# Altium PCB IMU.PcbDoc
Units mm, origin at the board's own origin, x right, y up, seen from the top; angles counter-clockwise.
Board outline 21.75 x 40.75 mm, 2 copper layers (Top Layer, Bottom Layer); 23 components, 27 nets, 121 pads, 63 vias.
Unrouted connection lines stored in the file: 63.
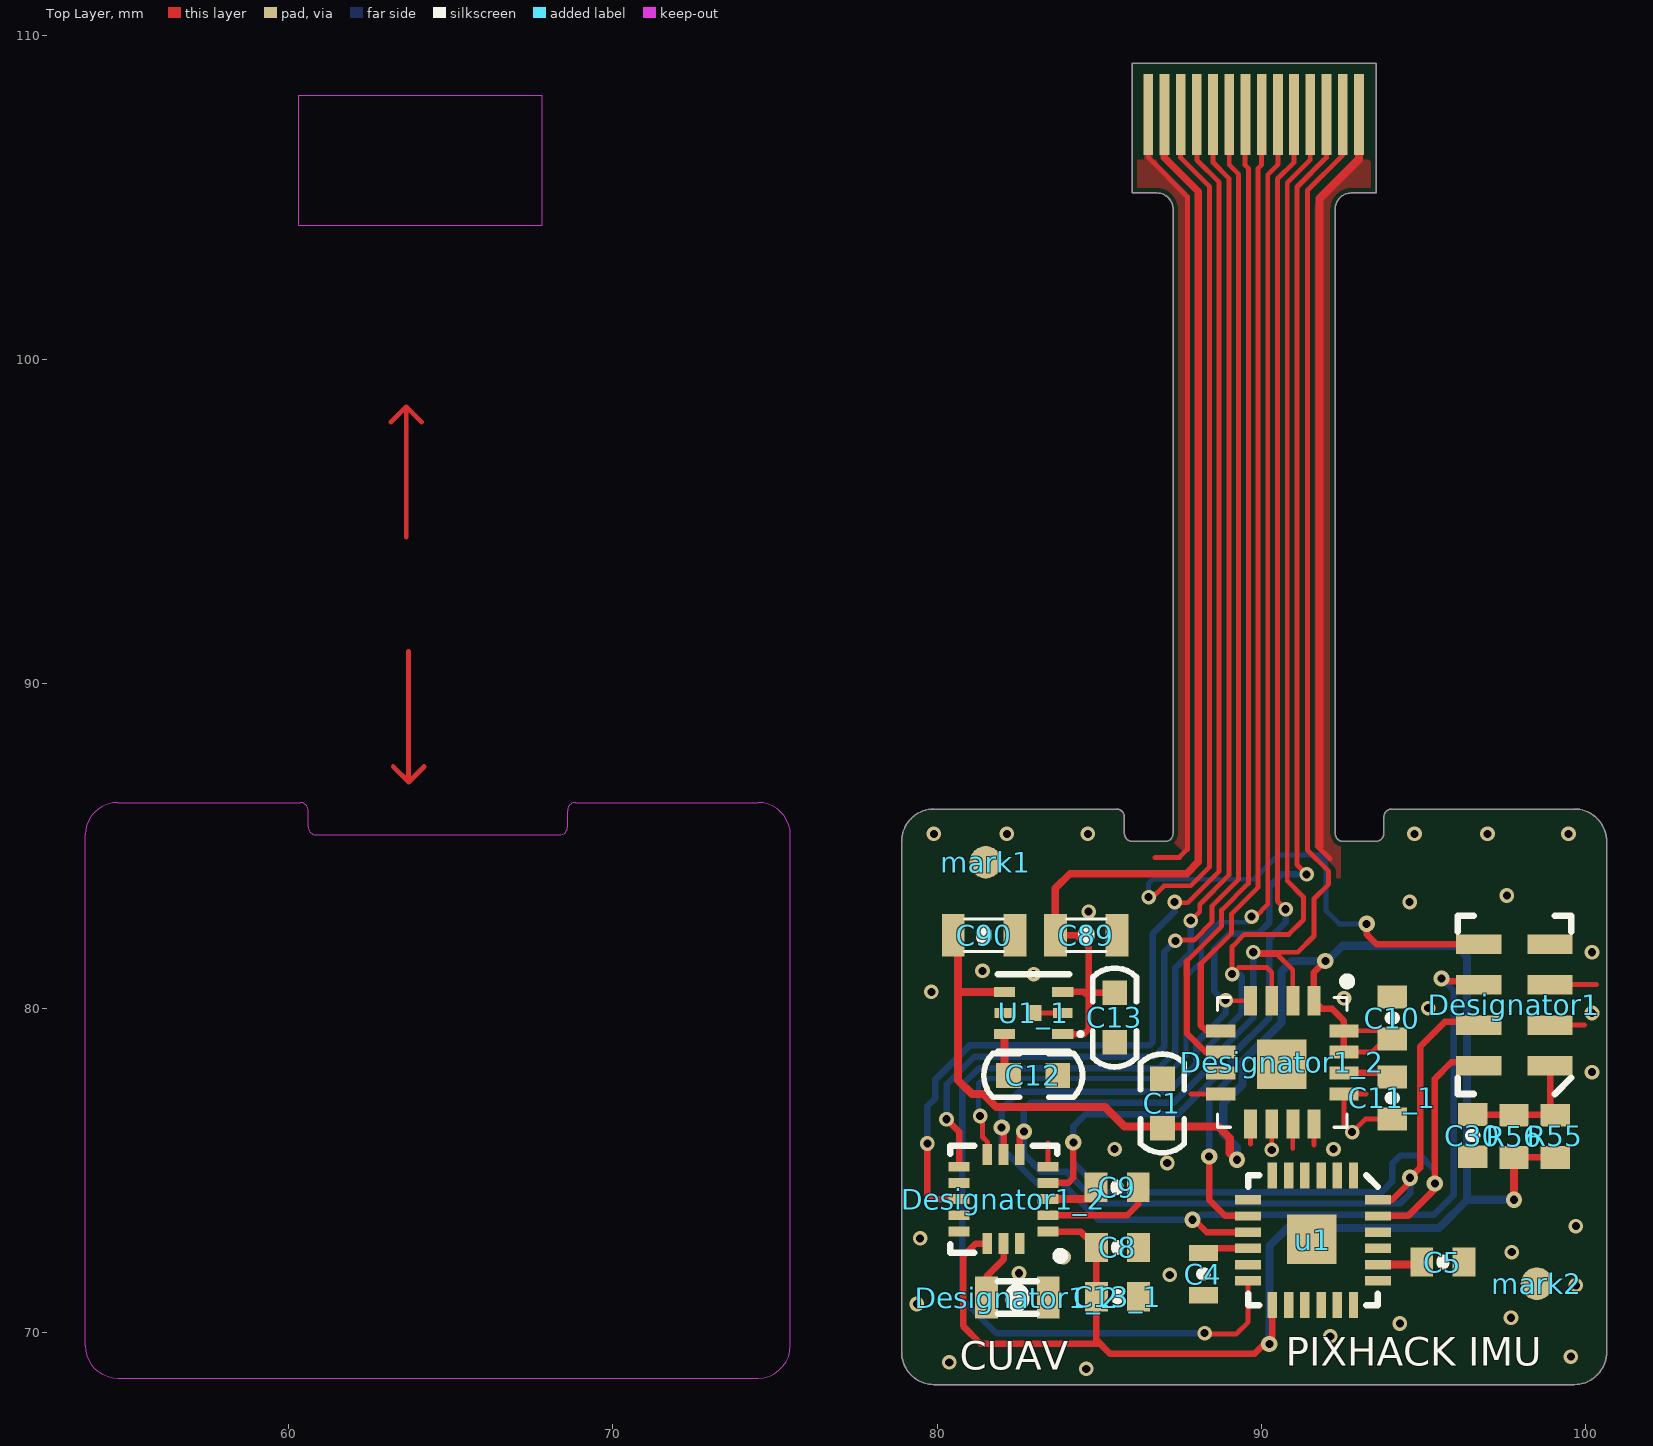
[diagram p0: Top Layer view]
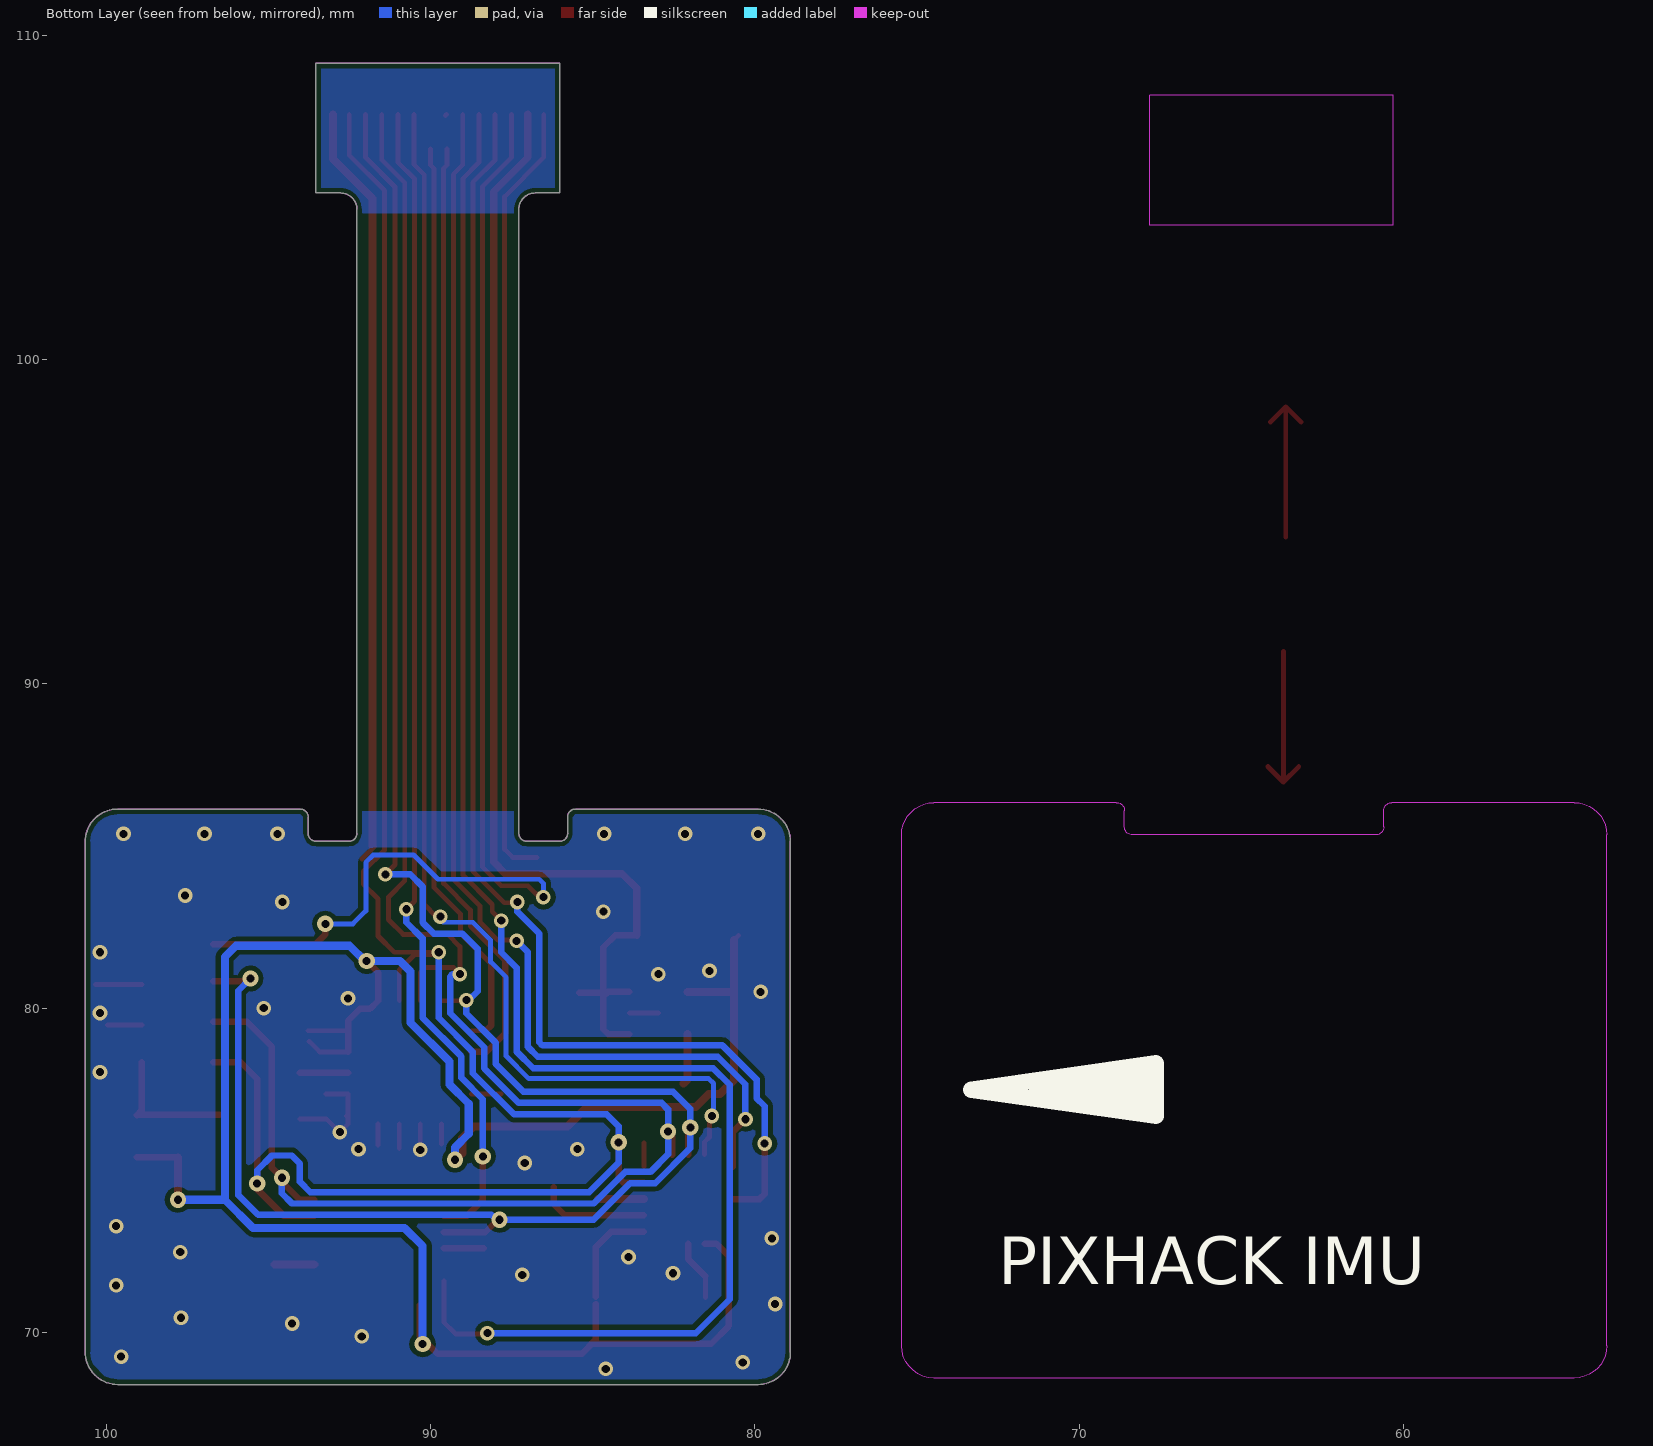
[diagram p1: Bottom Layer view, seen from below]
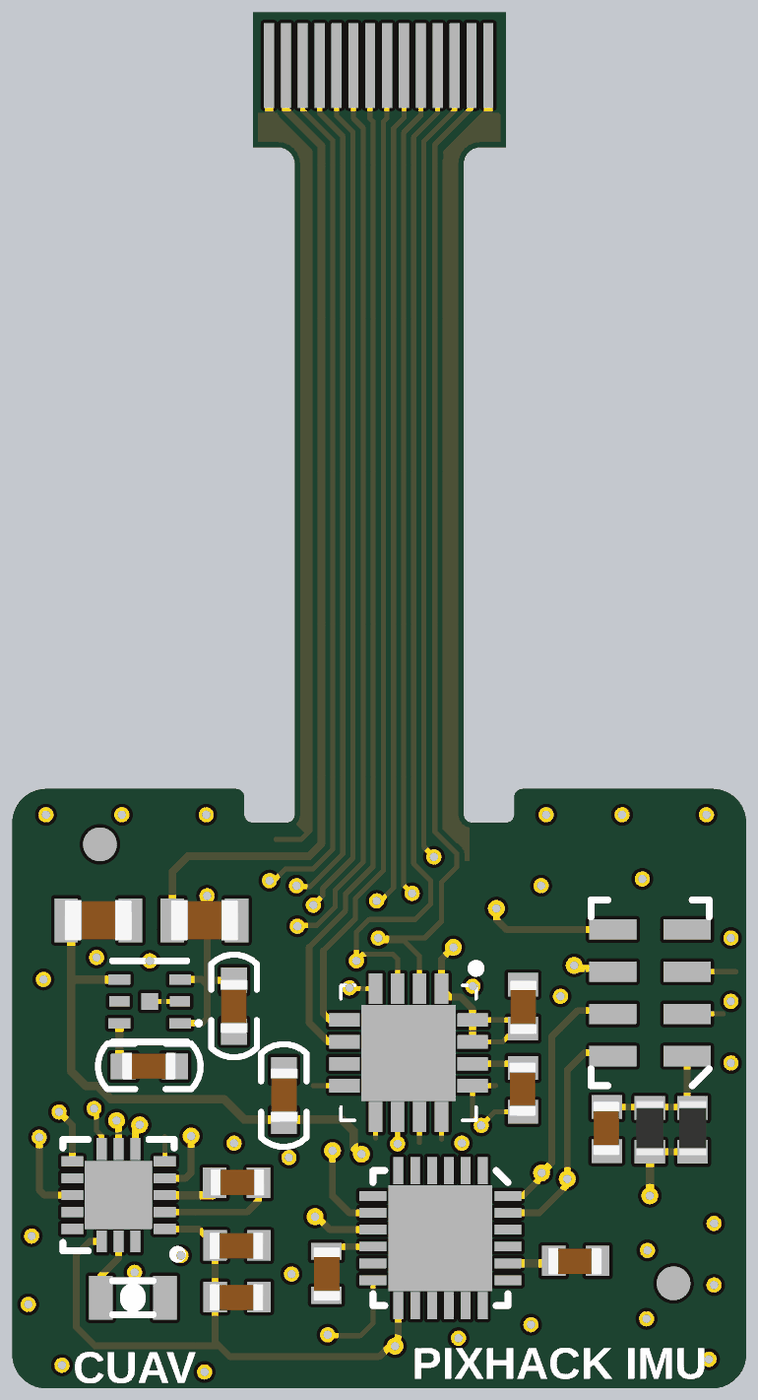
[diagram p2: 3D render of the assembled board from above, using the file's embedded part models]

## Layer stack, top to bottom
Top Layer: signal copper 0.0356
Dielectric: dielectric 0.32, FR-4, Dk 4.8
Bottom Layer: signal copper 0.0356

## Board outline
78.903,69.392 ccw(c79.903,69.392) 79.903,68.392 99.653,68.392 ccw(c99.653,69.392) 100.653,69.392 100.653,85.142 ccw(c99.653,85.142) 99.653,86.142 94.028,86.142 ccw(c94.028,85.892) 93.778,85.892 93.778,85.392 cw(c93.528,85.392) 93.528,85.142 92.528,85.142 cw(c92.528,85.392) 92.278,85.392 92.278,104.642 cw(c92.778,104.642) 92.778,105.142 93.54,105.142 93.54,109.142 86.015,109.142 86.015,105.142 86.778,105.142 cw(c86.778,104.642) 87.278,104.642 87.278,85.392 cw(c87.028,85.392) 87.028,85.142 86.028,85.142 cw(c86.028,85.392) 85.778,85.392 85.778,85.892 ccw(c85.528,85.892) 85.528,86.142 79.903,86.142 ccw(c79.903,85.142) 78.903,85.142

## Design rules (kind name [scope] priority, off if disabled: settings)
Clearance [All] p1: gap=0.15
PolygonConnect [All vs OnLayer('Multi-Layer')] p1: connectstyle=Direct reliefconductorwidth=0.254 reliefentries=4 polygonreliefangle="90 Angle"
RoutingVias [All] p1: holewidth=0.711 width=1.27 viastyle="Through Hole" minholewidth=0.711 minwidth=1.27 maxholewidth=0.711 maxwidth=1.27
SilkscreenOverComponentPads [All] p1: minsilkscreentomaskgap=0.254
SolderMaskExpansion [All] p1: expansion=0.102
Width [All] p1: maxlimit=0.5 minlimit=0.15 preferedwidth=0.254 minimp=50.000000 maximp=50.000000 favimp=50.000000
27 further rules are at their usual default settings.

## Components (designator, comment, footprint, x,y, rotation, side; value= is the part's Value field where it differs from the comment)
C1 "100NF" C0603 86.95,76.3 r90 top
C4 "100nf" 0603C#1 88.2,71.725 r90 top
C5 "10NF" 0603C#2 95.529,72.179 r0 top
C8 "100nf" 0603C#2 85.494,72.634 r0 top
C9 "0.22uf" 0603C#2 85.623,74.465 r180 top
C10 "1uf" 0603C#2 94.025,79.625 r90 top
C11_1 "10nf" 0603C#2 94.05,77.3 r270 top
C12 "470PF" C0603 83.725,77.925 r180 top
C13 "100NF" C0603 85.475,80.475 r270 top
C13_1 "100nf" 0603C#2 85.494,71.11 r0 top
C30 "100nf" 0603C#2 96.534,76.139 r270 top
C89 "2U2" 0805_CAP 84.6,82.25 r180 top
C90 "2U2" 0805_CAP 81.45,82.25 r180 top
Designator1 "Comment" MS5611-01BA 97.804,80.103 r180 top (schematic designator U506)
Designator1_2 "4.7uf" 0805-CAP 82.475,71.075 r0 top (schematic designator C509)
Designator1_2 "L3GD20" L3G4200DH-MAN 90.646,78.326 r270 top (schematic designator U501)
Designator1_2 "LSM303D" LGA-16L 82.051,74.111 r180 top (schematic designator U504)
mark1 "mark1" mark 80.5,91 r0 top
mark2 "mark1" mark 97.5,78 r0 top
R55 "22uh" 0603R 99.066,76.044 r90 top
R56 "10r" 0603R 97.796,76.044 r90 top
u1 "MPU6000" QFN-24 91.592,72.84 r270 top (schematic designator U505)
U1_1 "MIC5219-3V3" MLF-6 82.975,79.85 r180 top (schematic designator U$3)

## Footprints (in the part's own frame and the unit in brackets; to place one, negate y for a bottom-side part, rotate by r counter-clockwise, add the part's x,y. Pads: shape width x height; smd on the part's side, far side on the other; paste and mask are expansions set on the pad)
0603C#1 [mm]
  rect 0.5x0.9 smd: 1(0.721,-0.013) 2(-0.579,-0.013)
  silkscreen extent 0.07,-0.04 0.07,0.02, body extent -0.75,-0.42 0.85,0.38, height 0.6
0603C#2 [mm]
  rect 0.7x0.9 smd: 1(0.721,-0.013) 2(-0.579,-0.013)
  silkscreen extent 0.07,-0.04 0.07,0.02, body extent -0.75,-0.42 0.85,0.38, height 0.6
0603R [mm]
  rect 0.7x0.9 smd: 1(-0.65,-0.002) 2(0.65,-0.002)
  body extent -0.75,-0.4 0.85,0.4, height 0.44
0805-CAP [mm]
  rect 0.7x1.3 smd: P$1(-0.95,0) P$2(0.95,0)
  silkscreen extent -0.6,-0.5 0.6,0.5
0805_CAP [mm]
  rect 0.7x1.3 smd: 1(-0.95,0) 2(0.95,0)
  silkscreen extent -0.6,-0.5 0.6,0.5, body extent -1,-0.6 1,0.6, height 1.2
C0603 [mil]
  rect 30x30 smd: 1(0,0) 2(60,0)
  silkscreen extent -30,-27 90,27, body extent -1,-16 62,15, height 24
L3G4200DH-MAN [mm]
  rect 0.9x0.4 smd: 1(-1.9,0.975) 2(-1.9,0.325) 3(-1.9,-0.325) 4(-1.9,-0.975) 9(1.9,-0.975) 10(1.9,-0.325) 11(1.9,0.325) 12(1.9,0.975)
  rect 0.4x0.9 smd: 5(-0.975,-1.9) 6(-0.325,-1.9) 7(0.325,-1.9) 8(0.975,-1.9) 13(0.975,1.9) 14(0.325,1.9) 15(-0.325,1.9) 16(-0.975,1.9)
  silkscreen extent -2.6,-2 2,2.1
LGA-16L [mm]
  rect 0.65x0.3 smd: 1(-1.37,1) 2(-1.37,0.5) 3(-1.37,0) 4(-1.37,-0.5) 5(-1.37,-1) 9(1.37,-1) 10(1.37,-0.5) 11(1.37,0) 12(1.37,0.5) 13(1.37,1)
  rect 0.3x0.65 smd: 6(-0.5,-1.37) 7(0,-1.37) 8(0.5,-1.37) 14(0.5,1.37) 15(0,1.37) 16(-0.5,1.37)
  silkscreen extent -1.87,-1.65 1.65,1.87
mark [mm]
  round 1 smd: 1(1,-6.5)
MLF-6 [mm]
  rect 0.65x0.3 smd: 1(-0.9,0.65) 3(-0.9,-0.65) 4(0.9,-0.65) 6(0.9,0.65)
  rect 0.6x0.3 smd: 2(-0.9,0) 5(0.9,0)
  rect 0.5x0.5 smd: 7(0,0)
  silkscreen extent -1.51,-1.2 1.1,1.2, body extent -1.3,-0.9 1.3,0.9, height 1
MS5611-01BA [mm]
  rect 1.4x0.6 smd: 1(-1.1,1.875) 2(-1.1,0.625) 3(-1.1,-0.625) 4(-1.1,-1.875) 5(1.1,-1.875) 6(1.1,-0.625) 7(1.1,0.625) 8(1.1,1.875)
  silkscreen extent -1.75,-2.75 1.75,2.75
QFN-24 [mm]
  rect 0.8x0.29 smd: 1(-2,1.25) 2(-2,0.75) 3(-2,0.25) 4(-2,-0.25) 5(-2,-0.75) 6(-2,-1.25) 13(2,-1.25) 14(2,-0.75) 15(2,-0.25) 16(2,0.25) 17(2,0.75) 18(2,1.25)
  rect 0.29x0.8 smd: 7(-1.25,-2) 8(-0.75,-2) 9(-0.25,-2) 10(0.25,-2) 11(0.75,-2) 12(1.25,-2) 19(1.25,2) 20(0.75,2) 21(0.25,2) 22(-0.25,2) 23(-0.75,2) 24(-1.25,2)
  silkscreen extent -2,-2 2,2

## Free pads (board coordinates)
  rect 0.3x2.5 smd: 1(86.511,107.566) 2(87.011,107.566) 3(87.511,107.566) 4(88.011,107.566) 5(88.511,107.566) 6(89.011,107.566) 7(89.511,107.566) 8(90.011,107.566) 9(90.511,107.566) 10(91.011,107.566) 11(91.511,107.566) 12(92.011,107.566) 13(92.511,107.566) 14(93.011,107.566)
  rect 1.524x1.524 smd: 2(90.625,78.275) 2(91.55,72.875)

## Via types
v1: diameter 0.45, hole 0.25, Top Layer to Bottom Layer, 50 vias
v2: diameter 0.5, hole 0.25, Top Layer to Bottom Layer, 13 vias

## Nets (pads, with @x,y where several pads share a name; then routed paths per layer and width w, separated by ;. In a path a pad name is that pad's centre, name@x,y a point inside that pad or via, vN(x,y) a via of type N, cw(c..) or ccw(c..) an arc to the next point about the centre after c; other vN are vias at no path point)
3.0V: C30.2 Designator1.1 R55.2 R56.2 | length 4.2
  Top Layer w0.2: C30.2 R55.2@99.044,76.718 ; Designator1.1@98.904,78.328 98.904,76.858 R55.2
3.3V: 
5V: 
!ACCEL_MAG_CS: Designator1_2.8@81.551,75.481 pad.9 | length 39.9
  Top Layer w0.15: v1@81.4,76.675 81.4,76.025 81.551,75.874 Designator1_2.8@81.551,75.481 ; v1@89.825,82.825 90.2,83.2 90.2,105.701 90.511,106.012 pad.9
  Bottom Layer w0.15: v1(81.325,76.675) 81.275,76.725 81.275,77.675 81.425,77.825 86.975,77.825 87.675,78.525 87.675,80.95 88.15,81.425 88.15,82.1 88.7,82.65 89.625,82.65 89.7,82.725 89.825,82.725 v1@89.825,82.825
  other v1: 89.7,82.825
!BARO_CS: Designator1.5 pad.3 | length 39.1
  Top Layer w0.15: v1@86.575,83.35 87,83.775 87.829,83.775 88.4,84.346 88.4,105.346 87.511,106.235 pad.3
  Top Layer w0.2: v2(93.25,82.6) 93.25,82.275 93.547,81.978 Designator1.5
  Bottom Layer w0.15: v1@86.675,83.425 v1(86.525,83.425) 86.525,83.85 86.65,83.975 89.775,83.975 90.525,84.725 91.775,84.725 92,84.5 92,83 92.4,82.6 v2(93.25,82.6)
!GYRO_CS: Designator1_2.5@88.746,79.301 pad.8 | length 28.5
  Top Layer w0.15: 88.125,81.35 89.075,82.3 89.075,82.9 89.9,83.725 89.9,105.9 90,106 pad.8@90,106.5 ; Designator1_2.5@88.299,79.301 Designator1_2.5@88.746,79.301
  Top Layer w0.2: 88.125,81.35 88.125,79.475 Designator1_2.5@88.299,79.301
!MPU_CS: pad.10 u1.8 | length 36.1
  Top Layer w0.15: v1(90.75,83.05) 90.5,83.3 90.5,105.576 91.011,106.087 pad.10
  Top Layer w0.2: v2@88.392,75.354 88.392,74.084 88.886,73.59 u1.8
  Bottom Layer w0.2: v2(88.392,75.429) 88.392,77.192 89.05,77.85 89.05,78.505 90.25,79.705 90.25,82.15 90.75,82.65 v1(90.75,83.05)
ACCEL_DRDY: Designator1_2.11@80.681,74.111 pad.4 | length 41.9
  Top Layer w0.15: v1@87.275,83.25 87.728,83.25 88.7,84.222 88.7,105.47 88.011,106.159 pad.4
  Top Layer w0.2: v1(79.7,75.825) 79.7,74.267 79.856,74.111 Designator1_2.11@80.681,74.111
  Bottom Layer w0.2: v1(79.7,75.825) 79.7,76.975 79.95,77.225 79.95,77.8 81,78.85 86.55,78.85 86.65,78.95 86.65,82.3 87.325,82.975 v1(87.325,83.275)
FMU-VDD_3V3: 
GND: C1.2 C4.2 C5.1 C8.1 C10.1 C11_1.1 C12.1 C13.2 C13_1.1 C30.1 C89.1 C90.1 Designator1.2 Designator1.3 Designator1_2.5@83.421,75.111 Designator1_2.8@88.746,77.351 Designator1_2.9@89.671,76.426 Designator1_2.10 Designator1_2.11@90.971,76.426 Designator1_2.12 Designator1_2.13 Designator1_2.16@82.551,72.741 Designator1_2.P$2 pad.1 pad.14 u1.1 u1.18 U1_1.2 U1_1.7 | length 59.2
  Top Layer w0.15: U1_1.7 U1_1.2 ; Designator1_2.5@83.421,75.111 83.421,75.846 ; pad.1 86.511,106.239 87.72,105.03 87.72,84.895 87.475,84.65 86.725,84.65 ; 87.824,77.351 Designator1_2.8@88.746,77.351 ; 89.671,75.804 Designator1_2.9@89.671,76.426 ; v1(90.321,75.629) Designator1_2.10@90.321,76.426 ; 90.971,75.671 Designator1_2.11@90.971,76.426 ; 91.621,75.771 Designator1_2.12@91.621,76.426 ; 91.725,84.995 92.12,84.6 ; 92.6,76.675 92.546,76.675 ; 93.224,77.351 92.546,77.351 92.546,76.675 ; C11_1.1 93.204,76.579 v1(92.8,76.175) 92.546,76.429 92.546,76.675 ; Designator1.2 99.972,79.478 ; Designator1.3 100.347,80.728
  Top Layer w0.25: 91.8,84.995 91.8,104.975
  Top Layer w0.254: 91.8,104.975 93.011,106.186 pad.14
  other v1: 84.6,68.875 80.375,69.075 99.55,69.25 92.125,69.875 94.275,70.275 97.7,70.45 79.375,70.875 99.7,71.45 87.175,71.775 82.525,71.825 83.9,72.325 97.725,72.475 79.475,72.9 99.7,73.275 87.1,75.225 85.475,75.65 92.225,75.65 100.2,78.025 100.2,79.85 95.15,80 92.55,80.3 79.825,80.5 82.975,81.05 81.4,81.15 100.2,81.725 84.675,82.975 94.575,83.275 97.575,83.475 79.9,85.375 82.15,85.375 84.65,85.375 94.725,85.375 96.975,85.375 99.475,85.375
GYRO_DRDY: Designator1_2.6@88.746,78.651 pad.7 | length 29.4
  Top Layer w0.15: 87.7,81.449 88.775,82.524 88.775,83.024 89.6,83.849 89.6,105.9 89.5,106 pad.7@89.5,106.5 ; pad.7 pad.7@89.55,107.527
  Top Layer w0.2: 87.7,81.449 87.7,79.225 88.274,78.651 Designator1_2.6@88.746,78.651
MAG_DRDY: Designator1_2.9@80.681,75.111 pad.6 | length 40
  Top Layer w0.15: v1@87.425,82.1 87.926,82.1 88.475,82.649 88.475,83.149 89.3,83.974 89.3,105.718 89.011,106.007 pad.6
  Top Layer w0.2: v1(80.289,76.575) 80.681,76.183 Designator1_2.9@80.681,75.111
  Bottom Layer w0.2: v1(80.289,76.575) 80.3,76.586 80.3,77.655 81.145,78.5 86.695,78.5 87,78.805 87,81.725 v1(87.35,82.075)
MPU_DRDY: pad.5 u1.12 | length 54.1
  Top Layer w0.15: v1(87.825,82.7) 88.1,82.975 88.1,83.198 89,84.098 89,105.594 88.511,106.083 pad.5 ; v1@88.25,69.95 89.225,69.95 89.592,70.317 u1.12
  Bottom Layer w0.2: v1(87.825,82.7) 87.825,81.725 87.35,81.25 87.35,78.66 86.84,78.15 81.29,78.15 80.775,77.635 80.775,71.025 81.825,69.975 v1(88.25,69.975)
N$4: C12.2 U1_1.6 | length 1.6
  Top Layer w0.25: U1_1.6 82.075,77.801 C12.2@82.201,77.675
N$6: Designator1_2.15@82.051,72.741 Designator1_2.P$1 | length 1.9
  Top Layer w0.15: Designator1_2.P$1 81.525,71.725
  Top Layer w0.2: 81.525,71.725 82.051,72.251 Designator1_2.15@82.051,72.741
N$10: C9.2 Designator1_2.2@83.421,73.611 | length 3.4
  Top Layer w0.2: Designator1_2.2@83.421,73.611 85.861,73.611 86.203,73.952 C9.2
N$17: C9.1 Designator1_2.3@83.421,74.111 | length 1.4
  Top Layer w0.25: Designator1_2.3@83.421,74.111 C9.1@84.84,74.111
N$30: 
N$35: C11_1.2 Designator1_2.14@92.546,78.001 | length 1.5
  Top Layer w0.2: Designator1_2.14@92.546,78.001 C11_1.2@94.037,78.001
N$50: C4.1 u1.10 | length 1.2
  Top Layer w0.2: C4.1@88.357,72.59 u1.10
N$51: C5.2 u1.20 | length 1.2
  Top Layer w0.25: u1.20 C5.2@94.818,72.09
SPI_INT_MISO: Designator1.6 Designator1_2.4@89.671,80.226 Designator1_2.7@82.051,75.481 pad.12 u1.9 | length 67
  Top Layer w0.15: v1(88.9,80.25) 88.924,80.226 Designator1_2.4@89.671,80.226 ; v1(91.398,84.127) 91.1,84.425 91.1,105.328 92.011,106.239 pad.12
  Top Layer w0.2: Designator1_2.7@82.051,75.481 v2@82.051,76.319 ; v2@87.905,73.504 88.319,73.09 u1.9 ; v2(95.555,80.916) 95.643,80.828 Designator1.6@96.704,80.828
  Bottom Layer w0.2: v2@82.051,76.379 v2(81.991,76.319) ; v1(91.398,84.127) 90.627,84.127 90.25,83.75 90.25,82.645 89.905,82.3 89.025,82.3 88.55,81.825 88.55,80.525 88.825,80.25 v1(88.9,80.25) 88.9,79.84 88,78.94 88,78.285 87.14,77.425 82.525,77.425 81.991,76.891 v2(81.991,76.319) ; v2(95.555,80.916) 95.936,80.535 95.936,74.236 95.325,73.625 88.125,73.625 87.975,73.475 84.975,73.475 83.85,74.6 83.075,74.6 81.991,75.684 v2(81.991,76.319)
  other v2: 87.875,73.475
SPI_INT_MOSI: Designator1.7 Designator1_2.3@90.321,80.226 Designator1_2.6@82.551,75.481 pad.11 u1.24 | length 63.8
  Top Layer w0.15: Designator1_2.3@90.321,80.226 90.321,81.104 90.175,81.25 89.3,81.25 v1(89.1,81.05) 89.1,81.9 89.475,82.275 90.85,82.275 91.3,82.725 91.3,83.425 90.8,83.925 90.8,105.452 91.511,106.163 pad.11
  Top Layer w0.2: Designator1_2.6@82.551,75.481 82.551,76.066 v2(82.677,76.192) ; u1.24 94.037,74.09 v2@94.717,74.77 ; v2(94.59,74.77) 94.894,75.074 94.894,78.808 95.664,79.578 Designator1.7@96.704,79.578
  Bottom Layer w0.2: v1(89.1,81.05) 89.325,81.05 89.4,80.975 89.4,79.845 88.35,78.795 88.35,78.14 87.285,77.075 82.875,77.075 82.677,76.877 v2(82.677,76.192) 82.677,75.493 83.22,74.95 83.995,74.95 84.97,73.975 94.278,73.975 94.59,74.287 v2(94.59,74.77)
SPI_INT_SCK: Designator1.8 Designator1_2.2@90.971,80.226 Designator1_2.4@83.421,74.611 pad.13 u1.23 | length 63.1
  Top Layer w0.15: Designator1_2.2@90.971,80.226 90.971,81.179 90.5,81.65 89.825,81.65 v1(89.75,81.725) 91.125,81.725 91.625,82.225 91.625,83.375 92.075,83.825 92.075,84.221 91.425,84.871 91.425,105.225 92.511,106.311 pad.13
  Top Layer w0.2: Designator1_2.4@83.421,74.611 84.042,74.611 84.201,74.77 v2(84.201,75.862) ; u1.23 94.528,73.59 95.326,74.389 v2@95.326,74.592 ; v2(95.352,74.592) 95.352,77.818 95.862,78.328 Designator1.8@96.704,78.328
  Bottom Layer w0.2: v1(89.75,81.725) 89.75,79.7 88.7,78.65 88.7,77.995 87.43,76.725 84.575,76.725 84.201,76.351 v2(84.201,75.862) 84.201,75.239 85.115,74.325 93.713,74.325 94.031,74.643 94.031,75.201 94.285,75.455 94.894,75.455 95.352,74.998 v2(95.352,74.592)
VDD_3V3_SENSORS: C1.1 C8.2 C10.2 C13_1.2 C90.2 Designator1_2.1 Designator1_2.14@81.551,72.741 Designator1_2.15@92.546,78.651 Designator1_2.16@92.546,79.301 R55.1 R56.1 u1.13 U1_1.4 | length 74.7
  Top Layer w0.15: C90.2 C90.2@80.65,82.1 ; Designator1_2.15@92.546,78.651 93.426,78.651 C10.2@93.75,78.975 ; Designator1_2.16@92.546,79.301 C10.2@93.782,79.301
  Top Layer w0.2: Designator1_2.14@81.551,72.741 81.191,72.741 80.8,72.35 80.8,70.2 81.35,69.65 85.025,69.65 ; Designator1_2.1@83.421,73.111 84.425,73.111 C8.2 C13_1.2 ; C13_1.2@84.915,70.875 84.915,69.763 85.344,69.334 89.784,69.334 90.342,69.892 u1.13 ; v2(91.975,81.45) 91.621,81.096 91.621,80.226 91.873,79.975 92.189,79.975 92.546,79.618 92.546,79.301 Designator1_2.15@92.546,78.651 ; v2@97.79,74.084 v2(97.798,74.091) ; R56.1 R55.1
  Top Layer w0.25: C90.2@80.65,82.1 80.65,80.5 ; U1_1.4 80.65,80.5 ; v2(89.25,75.325) 89.225,75.325 89.025,75.525 89.025,76 88.675,76.35 85.775,76.35 85.175,76.95 81.825,76.95 81.425,77.35 81.075,77.35 80.65,77.775 80.65,80.5 ; v2(97.798,74.091) R56.1
  Bottom Layer w0.25: v2(89.25,75.325) 89.25,75.7 88.825,76.125 88.825,77.05 89.425,77.65 89.425,78.35 90.625,79.55 90.625,81.125 90.95,81.45 v2(91.975,81.45) 92.025,81.45 92.5,81.925 96,81.925 96.35,81.575 96.35,74.091 ; v2(90.246,69.639) 90.246,72.661 90.805,73.22 95.479,73.22 96.35,74.091 ; v2(97.798,74.091) 96.35,74.091
VDD_5V_IN: C13.1 C89.2 pad.2@87.011,107.566 U1_1.1 U1_1.3 | length 35.9
  Top Layer w0.15: 84.675,80.35 84.675,80.4
  Top Layer w0.2: C89.2 84.3,82.25 84.675,81.875 84.675,80.4 84.75,80.475 C13.1@85.425,80.475 ; U1_1.1 84.525,79.2 84.675,79.35 84.675,80.35 84.525,80.5 U1_1.3
  Top Layer w0.23: C89.2 83.65,83.7 84.1,84.15 87.7,84.15 88.06,84.51 88.06,105.188 87.011,106.237 pad.2@87.011,107.566
VGND: 
pads on no net: Designator1.4 Designator1_2.7@88.746,78.001 mark1.1 mark2.1 u1.2 u1.3 u1.4 u1.5 u1.6 u1.7 u1.11 u1.14 u1.15 u1.16 u1.17 u1.19 u1.21 u1.22 U1_1.5
copper on no net: | length 10.7
  Top Layer w0.15: 63.15,98.075 63.625,98.55 ; 63.225,87.45 63.7,86.975 ; 63.625,94.525 63.625,98.55 ; 63.7,91 63.7,86.975 ; 64.1,98.075 63.625,98.55 ; 64.175,87.45 63.7,86.975

## Polygon pours and split planes (outlines as drawn)
GND on Top Layer "Top Layer-No Net" (solid, remove dead copper, pour order 9): 87.7,84.725 87.7,105.272 86.4,106.5 86.35,106.453 86.015,106.453 86.015,105.021 86.125,104.918 86.275,105.059 86.9,105.059 86.9,105.036 87.375,104.587 87.318,104.533 87.318,85.082
GND on Top Layer "Top Layer-No Net" (solid, remove dead copper, pour order 6): 91.8,84.049 91.85,84 92.45,84 92.45,104.934 92.55,105.032 92.6,104.983 93.475,104.983 93.475,106.656 93.125,107 92.975,106.852 92.975,106.729 92.975,106.065 91.8,104.909 91.654,104.766 91.654,84.502
GND on Bottom Layer "Top Layer-No Net" (solid, remove dead copper, pour order 8): 78.725,87.198 78.675,87.145 78.675,68.1 99.525,68.1 100.775,69.412 100.7,69.49 100.7,87.119 93.175,87.119 93.125,87.171 93.05,87.093 93.05,86.07 86.797,86.07 86.726,85.996 86.425,86.312 86.425,87.119 78.925,87.119 78.8,87.25
GND on Bottom Layer "Top Layer-No Net" (solid, pour order 10): 85.741,105.022 86.793,105.022 87.32,104.522 92.096,104.522 92.623,105.022 93.675,105.022 93.675,109.022 85.741,109.022 85.741,105.022

## Keep-outs
Keep-Out Layer:
  lines w0.004: 53.728,69.592 ccw(c54.728,69.592) 54.728,68.592 74.478,68.592 ccw(c74.478,69.592) 75.478,69.592 75.478,85.342 ccw(c74.478,85.342) 74.478,86.342 68.853,86.342 ccw(c68.853,86.092) 68.603,86.092 68.603,85.592 cw(c68.353,85.592) 68.353,85.342 67.353,85.342 60.853,85.342 cw(c60.853,85.592) 60.603,85.592 60.603,86.092 ccw(c60.353,86.092) 60.353,86.342 54.728,86.342 ccw(c54.728,85.342) 53.728,85.342 53.728,69.592 ; 60.304,104.155 60.304,108.155 64.066,108.155 67.829,108.155 67.829,104.155 66.831,104.155 60.304,104.155 ; 78.903,69.392 ccw(c79.903,69.392) 79.903,68.392 99.653,68.392 ccw(c99.653,69.392) 100.653,69.392 100.653,85.142 ccw(c99.653,85.142) 99.653,86.142 94.028,86.142 ccw(c94.028,85.892) 93.778,85.892 93.778,85.392 cw(c93.528,85.392) 93.528,85.142 92.528,85.142 cw(c92.528,85.392) 92.278,85.392 92.278,104.642 cw(c92.778,104.642) 92.778,105.142 93.54,105.142 93.54,109.142 89.778,109.142 86.015,109.142 86.015,105.142 86.778,105.142 cw(c86.778,104.642) 87.278,104.642 87.278,85.392 cw(c87.028,85.392) 87.028,85.142 86.028,85.142 cw(c86.028,85.392) 85.778,85.392 85.778,85.892 ccw(c85.528,85.892) 85.528,86.142 79.903,86.142 ccw(c79.903,85.142) 78.903,85.142 78.903,69.392

## Silkscreen, mask and mechanical layers (free items; w line width, h text height)
Top Overlay:
  text "PIXHACK IMU" at 90.75,68.675 h1.5
  text "CUAV" at 80.7,68.55 h1.5
Bottom Overlay:
  lines w0.508: 68.048,77.08 71.299,77.487 ; 68.048,77.893 70.487,77.487 ; 69.267,77.487 67.642,77.487 ; 67.642,77.487 67.642,76.674 73.331,77.487 67.642,78.299 67.642,77.487
  text "PIXHACK IMU" at 72.5,71 h2.5
Top Paste:
  rectangle: 81.05,73.1 83.05,75.125
  rectangle: 90.05,71.275 93.125,74.4
  rectangle: 89.25,76.9 92.05,79.75